# EAGLE board series_12led (EAGLE 7.5.0)
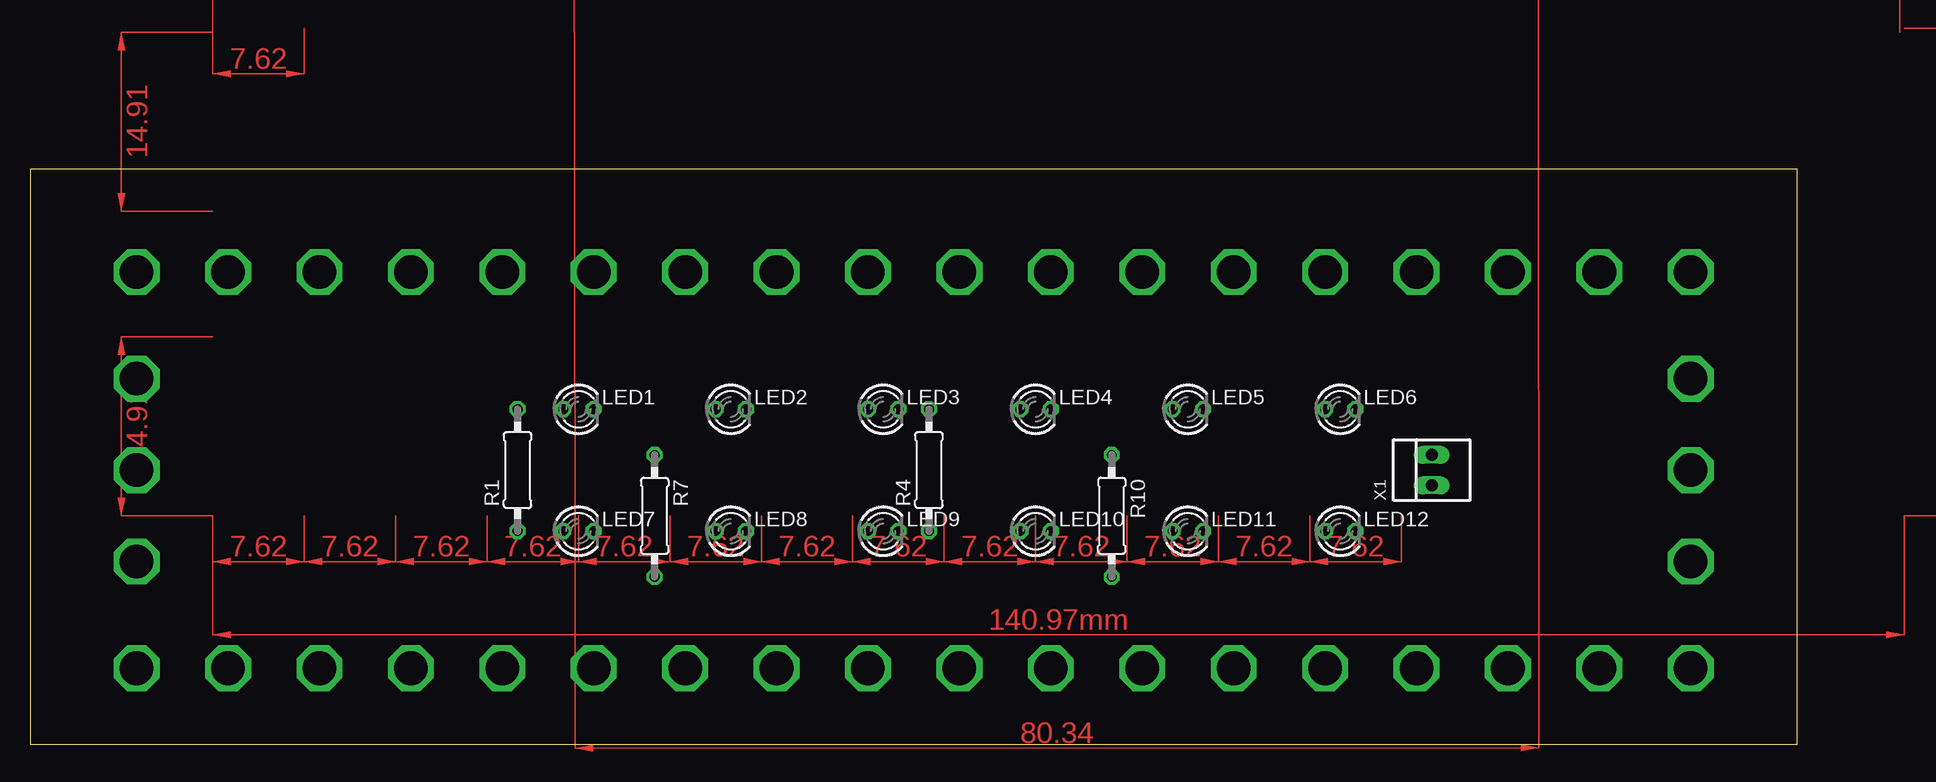
[diagram p0: board, top side]
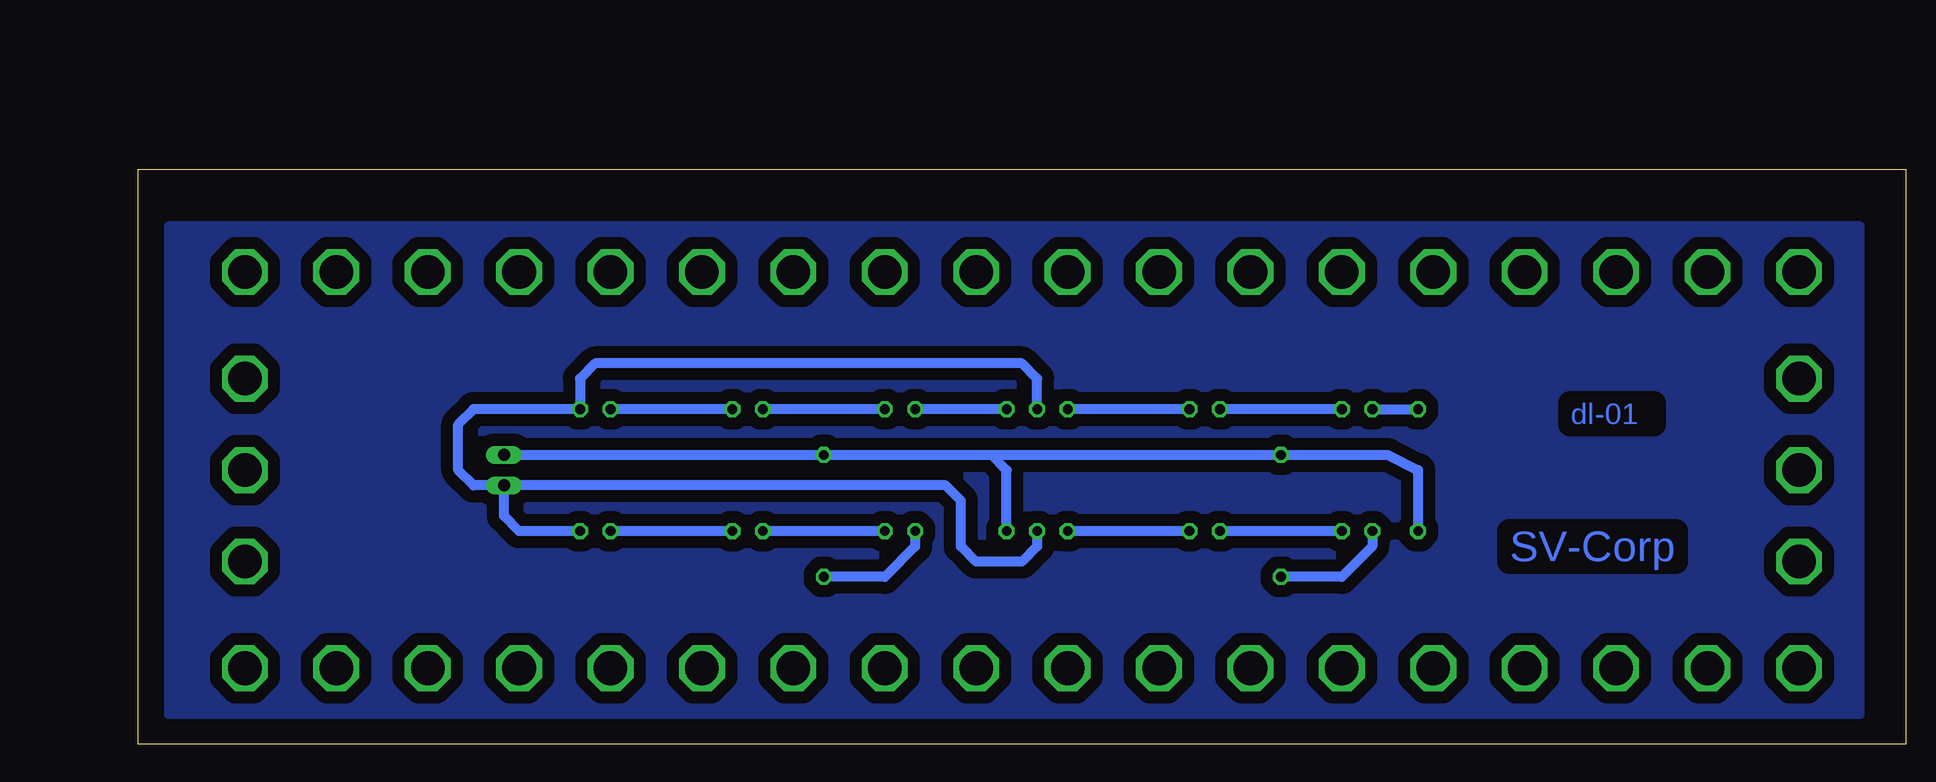
[diagram p1: board, bottom side, seen from below]

Size 147.3 x 47.93 mm. Coordinates in mm from the lower left corner, seen from the top.
Outline: 0,0 147.3,0 147.3,47.93 0,47.93 0,0
Copper layers (1*16): Top 0.035mm / dielectric 1.5mm / Bottom 0.035mm
Design rules "default": minimum track width 10mil, minimum drill 24mil, track to track 8mil, track to pad 8mil, pad to pad 8mil, via to via 8mil, smd to smd 8mil, copper to edge 40mil, drill to drill 8mil, minimum pad ring 10mil, minimum via ring 8mil, stop-mask expansion 4mil, vias tented up to drill 0mil, thermal gap 10mil

## Footprints (pad centres in the part's own frame; a part is rotated, then mirrored left to right if it is on the bottom)
LED3MM = drill 0.813 octagon: A -1.27,0; K 1.27,0
0207/10 = drill 0.813 octagon: 1 -5.08,0; 2 5.08,0
22-23-2021 = drill 1 long: 1 -1.27,0; 2 1.27,0

## Placement (x,y rotation side)
LED1  [LED3MM]  45.72,27.94 0 top
LED2  [LED3MM]  58.42,27.94 0 top
LED3  [LED3MM]  71.12,27.94 0 top
LED4  [LED3MM]  83.82,27.94 0 top
LED5  [LED3MM]  96.52,27.94 0 top
LED6  [LED3MM]  109.22,27.94 0 top
LED7  [LED3MM]  45.72,17.78 0 top
LED8  [LED3MM]  58.42,17.78 0 top
LED9  [LED3MM]  71.12,17.78 0 top
LED10  [LED3MM]  83.82,17.78 0 top
LED11  [LED3MM]  96.52,17.78 0 top
LED12  [LED3MM]  109.22,17.78 0 top
R1  [0207/10]  40.64,22.86 90 top
R4  [0207/10]  74.93,22.86 90 top
R7  [0207/10]  52.07,19.05 270 top
R10  [0207/10]  90.17,19.05 270 top
X1  22-23-2021  [22-23-2021]  116.84,22.86 90 top

## Library data of the parts
LED1-LED12 = led
R1 R4 R7 R10 = resistor
X1 = con-molex; MF: MOLEX; MPN: 22-23-2021; OC_FARNELL: 1462926; OC_NEWARK: 25C3832

## Nets
N$1: R1.1 R4.1 R7.1 R10.1 X1.2
N$2: LED1.A R1.2
N$3: LED1.K LED2.A
N$4: LED2.K LED3.A
N$5: LED4.A R4.2
N$6: LED4.K LED5.A
N$7: LED5.K LED6.A
N$8: LED7.A R7.2
N$9: LED7.K LED8.A
N$10: LED8.K LED9.A
N$11: LED10.A R10.2
N$12: LED10.K LED11.A
N$13: LED11.K LED12.A
N$16: LED3.K LED6.K LED9.K LED12.K X1.1

## Tracks (layer width: path | path; a pad name or v marks a point on that pad's centre or on a via)
N$1
  Bottom 0.813: X1.2 R10.1 76.2,24.13 | 76.2,24.13 R7.1 43.18,24.13 40.64,22.86 R1.1 | R4.1 74.93,22.86 76.2,24.13
N$2
  Bottom 0.813: LED1.A R1.2
N$3
  Bottom 0.813: LED1.K LED2.A
N$4
  Bottom 0.813: LED2.K LED3.A
N$5
  Bottom 0.813: R4.2 LED4.A
N$6
  Bottom 0.813: LED4.K LED5.A
N$7
  Bottom 0.813: LED5.K LED6.A
N$8
  Bottom 0.813: LED7.A 44.45,16.51 46.99,13.97 R7.2
N$9
  Bottom 0.813: LED7.K LED8.A
N$10
  Bottom 0.813: LED8.K LED9.A
N$11
  Bottom 0.813: LED10.A 82.55,16.51 85.09,13.97 R10.2
N$12
  Bottom 0.813: LED10.K LED11.A
N$13
  Bottom 0.813: LED11.K LED12.A
N$14
  pour Bottom (isolate 1.016): 3.81,43.18 144.78,43.18 144.78,2.54 3.81,2.54
N$16
  Bottom 0.813: LED3.K 72.39,30.48 73.66,31.75 109.22,31.75 110.49,30.48 LED6.K 119.38,27.94 120.65,26.67 120.65,22.86 119.38,21.59 X1.1 | LED9.K 72.39,16.51 73.66,15.24 77.47,15.24 78.74,16.51 78.74,20.32 80.01,21.59 X1.1 | LED12.K 115.57,17.78 116.84,19.05 X1.1
N$19  (via drill 2.8)
  other vias: 39.37,6.35
N$32  (via drill 2.8)
  other vias: 24.13,39.37
N$33  (via drill 2.8)
  other vias: 39.37,39.37
N$34  (via drill 2.8)
  other vias: 46.99,39.37
N$35  (via drill 2.8)
  other vias: 54.61,39.37
N$36  (via drill 2.8)
  other vias: 62.23,39.37
N$37  (via drill 2.8)
  other vias: 69.85,39.37
N$38  (via drill 2.8)
  other vias: 77.47,39.37
N$39  (via drill 2.8)
  other vias: 85.09,39.37
N$40  (via drill 2.8)
  other vias: 92.71,39.37
N$41  (via drill 2.8)
  other vias: 100.33,39.37
N$42  (via drill 2.8)
  other vias: 107.95,39.37
N$43  (via drill 2.8)
  other vias: 115.57,39.37
N$44  (via drill 2.8)
  other vias: 123.19,39.37
N$45  (via drill 2.8)
  other vias: 130.81,39.37
N$46  (via drill 2.8)
  other vias: 138.43,39.37
N$47  (via drill 2.8)
  other vias: 138.43,30.48
N$48  (via drill 2.8)
  other vias: 138.43,22.86
N$51  (via drill 2.8)
  other vias: 16.51,6.35
N$54  (via drill 2.8)
  other vias: 138.43,6.35
N$55  (via drill 2.8)
  other vias: 138.43,15.24
N$56  (via drill 2.8)
  other vias: 130.81,6.35
N$57  (via drill 2.8)
  other vias: 123.19,6.35
N$58  (via drill 2.8)
  other vias: 115.57,6.35
N$59  (via drill 2.8)
  other vias: 107.95,6.35
N$60  (via drill 2.8)
  other vias: 100.33,6.35
N$61  (via drill 2.8)
  other vias: 92.71,6.35
N$62  (via drill 2.8)
  other vias: 85.09,6.35
N$63  (via drill 2.8)
  other vias: 77.47,6.35
N$64  (via drill 2.8)
  other vias: 69.85,6.35
N$65  (via drill 2.8)
  other vias: 62.23,6.35
N$66  (via drill 2.8)
  other vias: 54.61,6.35
N$67  (via drill 2.8)
  other vias: 46.99,6.35
N$68  (via drill 2.8)
  other vias: 31.75,6.35
N$69  (via drill 2.8)
  other vias: 24.13,6.35
N$70  (via drill 2.8)
  other vias: 8.89,6.35
N$71  (via drill 2.8)
  other vias: 8.89,15.24
N$72  (via drill 2.8)
  other vias: 8.89,22.86
N$73  (via drill 2.8)
  other vias: 8.89,30.48
N$74  (via drill 2.8)
  other vias: 8.89,39.37
N$75  (via drill 2.8)
  other vias: 16.51,39.37
N$76  (via drill 2.8)
  other vias: 31.75,39.37
(copper drawn outside any net)
  shapes: Top area x21

## Text on the board
Bottom: dl-01 | SV-Corp